# Altium PCB Sprinkler_v3_20221229.pcbdoc
Units mil, origin at the board's own origin, x right, y up, seen from the top; angles counter-clockwise.
Board outline 8914.07 x 7654.67 mil, 2 copper layers (Top Layer, Bottom Layer); 30 components, 40 nets, 224 pads, 0 vias.
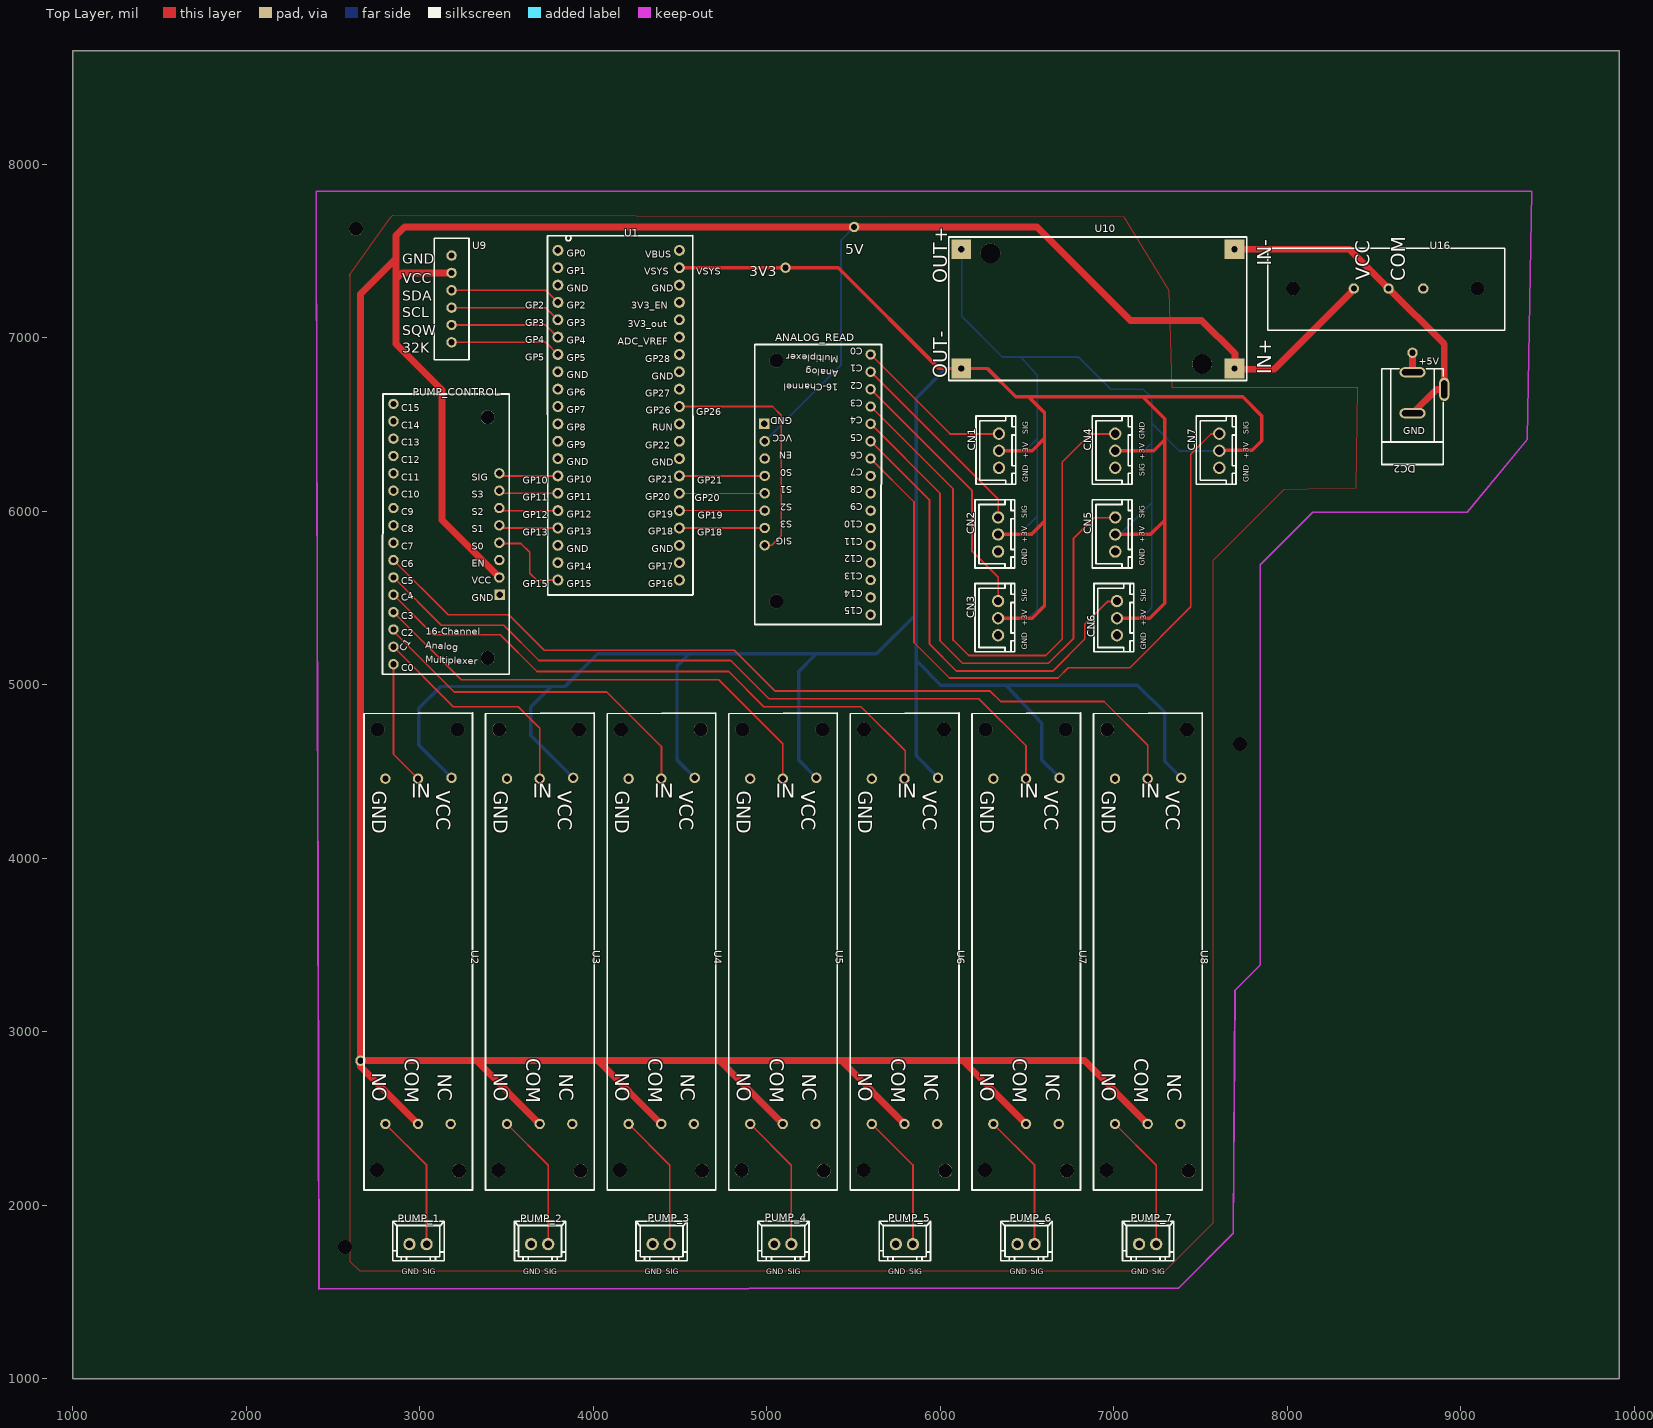
[diagram p0: Top Layer view]
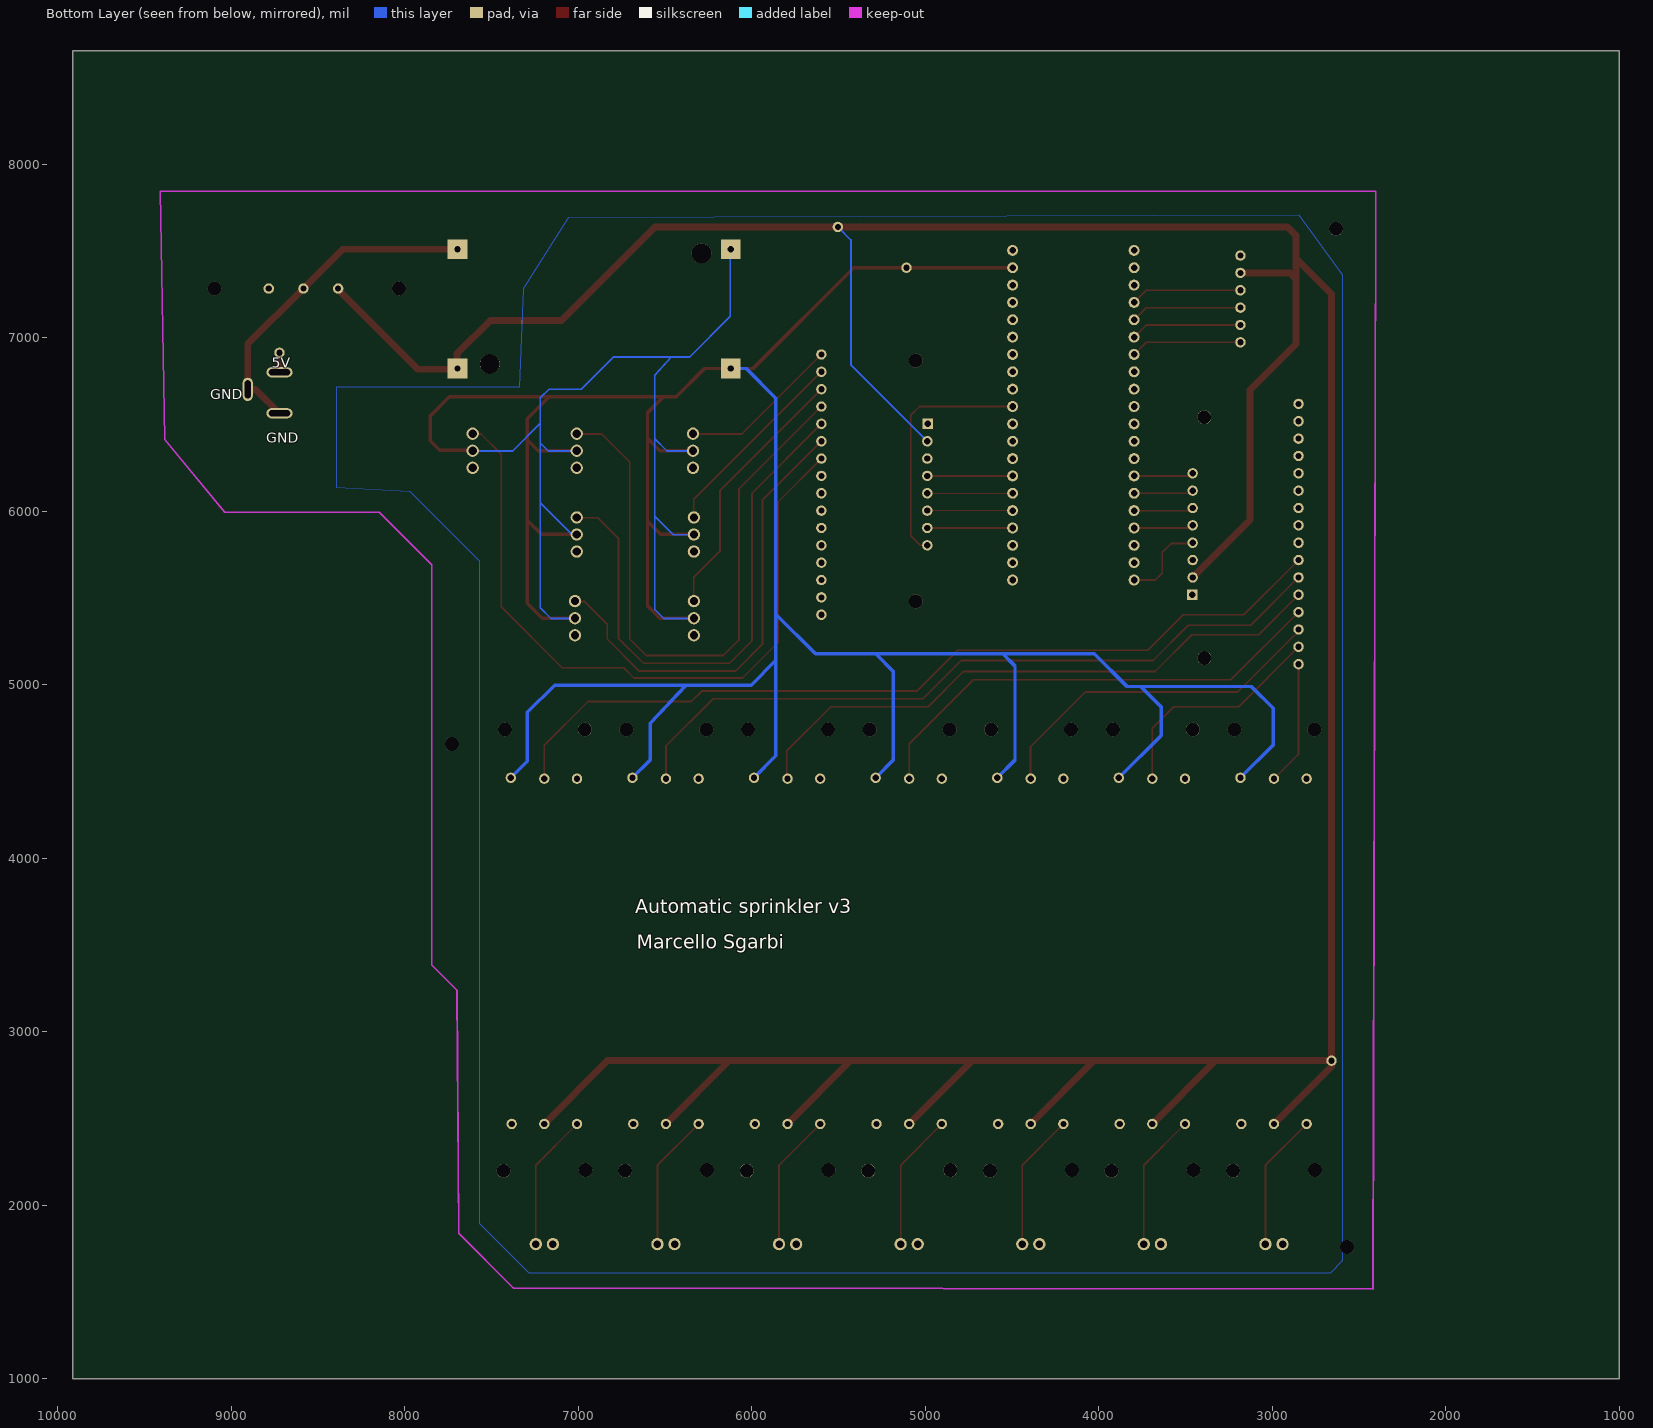
[diagram p1: Bottom Layer view, seen from below]

## Layer stack, top to bottom
Top Layer: signal copper (thickness not stored)
Dielectric: dielectric 12.6, FR-4, Dk 4.8
Bottom Layer: signal copper (thickness not stored)

## Board outline
9914.07,1000 1000,1000 1000,8654.67 9914.07,8654.67

## Components (designator, comment, footprint, x,y, rotation, side; value= is the part's Value field where it differs from the comment)
ANALOG_READ "16 - Cahnnel analog multiplexer" "16 CHANNEL ANANLOG MUX" 5598.77,5403.77 r180 top
CN1 "Signal_1" CONN-TH_XH-3A 6338.78,6348.77 r90 top
CN2 "Signal_2" CONN-TH_XH-3A 6333.78,5866.27 r90 top
CN3 "Signal_3" CONN-TH_XH-3A 6333.78,5383.77 r90 top
CN4 "Signal_4" CONN-TH_XH-3A 7008.78,6348.77 r90 top
CN5 "Signal_5" CONN-TH_XH-3A 7008.78,5866.27 r90 top
CN6 "Signal_6" CONN-TH_XH-3A 7018.78,5383.77 r90 top
CN7 "Signal_7" CONN-TH_XH-3A 7608.78,6348.77 r90 top
DC2 "KH-DC-005B-2.0-Switch" DC-IN-TH_DC-005B-13A-SWITCH 8813.62,6683.07 r180 top
PUMP_1 "XH-2A_C9900014608" CONN-TH_XH-2A 2990.42,1776.27 r0 top
PUMP_2 "XH-2A_C9900014608" CONN-TH_XH-2A 3691.22,1776.27 r0 top
PUMP_3 "XH-2A_C9900014608" CONN-TH_XH-2A 4392.02,1776.27 r0 top
PUMP_4 "XH-2A_C9900014608" CONN-TH_XH-2A 5092.92,1776.27 r0 top
PUMP_5 "XH-2A_C9900014608" CONN-TH_XH-2A 5793.72,1776.27 r0 top
PUMP_6 "XH-2A_C9900014608" CONN-TH_XH-2A 6494.52,1776.27 r0 top
PUMP_7 "XH-2A_C9900014608" CONN-TH_XH-2A 7195.42,1776.27 r0 top
PUMP_CONTROL "16 - Cahnnel analog multiplexer" "16 CHANNEL ANANLOG MUX" 2848.77,6618.77 r0 top
U1 "RaspberryPI PicoW 2022" RASPERRYPI_PICOW_2022 3768.77,7503.77 r0 top
U2 "3V realy module" "3V MODULE FOOTPRINT" 3178.77,4458.77 r270 top
U3 "3V realy module" "3V MODULE FOOTPRINT" 3879.57,4458.77 r270 top
U4 "3V realy module" "3V MODULE FOOTPRINT" 4580.47,4458.77 r270 top
U5 "3V realy module" "3V MODULE FOOTPRINT" 5281.27,4458.77 r270 top
U6 "3V realy module" "3V MODULE FOOTPRINT" 5982.07,4458.77 r270 top
U7 "3V realy module" "3V MODULE FOOTPRINT" 6682.97,4458.77 r270 top
U8 "3V realy module" "3V MODULE FOOTPRINT" 7383.77,4458.77 r270 top
U9 "RTC DS3231" "RTC DS3231" 3183.77,6973.77 r90 top
U10 "LM2596 Buck Converter" "LM2596 BUCK CONVERTER" 6120.77,7509.87 r0 top
U16 "Switch 3A 125VAC" "SWITCH 3A" 8033.77,7283.77 r0 top
? "" ? 1972.79,4671.28 r0 top
? "" ? 5916.01,7992.68 r0 top

## Footprints (in the part's own frame and the unit in brackets; to place one, negate y for a bottom-side part, rotate by r counter-clockwise, add the part's x,y. Pads: shape width x height; smd on the part's side, far side on the other; paste and mask are expansions set on the pad)
"3V MODULE FOOTPRINT" [mil]
  round 60 hole 36: 1(-5,5) 2(0,-188.19) 3(0,-376.38) 4(1989.88,-376.38) 5(1989.88,-188.19) 6(1989.88,0)
  round 80 hole 80 unplated: ""(-283.46,39.37) ""(-283.46,-421.26) ""(2255.9,-425.2) ""(2259.84,47.24)
  silkscreen extent -378,-500 2370,126
"16 CHANNEL ANANLOG MUX" [mil]
  round 60 hole 36: 1(0,0) 2(0,-100) 3(0,-200) 4(0,-300) 5(0,-400) 6(0,-500) 7(0,-600) 8(0,-700) 9(0,-800) 10(0,-900) 11(0,-1000) 12(0,-1100) 13(0,-1200) 14(0,-1300) 15(0,-1400) 16(0,-1500) 18(610.23,-1000) 19(610.23,-900) 20(610.23,-800) 21(610.23,-700) 22(610.23,-600) 23(610.23,-500) 24(610.23,-400)
  rect 60x60 hole 36: 17(612.23,-1100)
  round 80 hole 80 unplated: ""(543.31,-76.77) ""(543.31,-1464.56)
  silkscreen extent -63,-1557 667,57
CONN-TH_XH-2A [mm]
  round 1.8 hole 1.1: 1(-1.251,0) 2(1.251,0)
  silkscreen extent -3.69,-2.45 3.83,3.35
CONN-TH_XH-3A [mm]
  round 1.8 hole 1.2: 1(-2.5,0) 2(0,0) 3(2.5,0)
  silkscreen extent -4.92,-2.44 5.09,3.38
DC-IN-TH_DC-005B-13A-SWITCH [mm]
  oval 3.8x1.5 hole 0.9 slot 3.1 at 0 deg: 1(2.325,-3.001) 2(2.325,2.999)
  oval 1.5x3.4 hole 0.9 slot 2.6 at 90 deg: 3(-2.325,-0.5)
  round 1.524 hole 0.914: 4(2.325,-5.842)
  silkscreen extent -2.17,-3.5 6.83,10.5
"LM2596 BUCK CONVERTER" [mm]
  rect 2.9x2.9 hole 0.914: 1(40,-17.45) 2(40,0) 3(0,0) 4(0,-17.45)
  round 2.9 hole 2.9 unplated: ""(4.3,-0.6) ""(35.3,-16.8)
  silkscreen extent -1.8,-19.2 41.8,1.8
RASPERRYPI_PICOW_2022 [mm]
  round 1.6 hole 0.96: 1(0.71,0) 2(0.71,-2.54) 3(0.71,-5.08) 4(0.71,-7.62) 5(0.71,-10.16) 6(0.71,-12.7) 7(0.71,-15.24) 8(0.71,-17.78) 9(0.71,-20.32) 10(0.71,-22.86) 11(0.71,-25.4) 12(0.71,-27.94) 13(0.71,-30.48) 14(0.71,-33.02) 15(0.71,-35.56) 16(0.71,-38.1) 17(0.71,-40.64) 18(0.71,-43.18) 19(0.71,-45.72) 20(0.71,-48.26) 21(18.49,-48.26) 22(18.49,-45.72) 23(18.49,-43.18) 24(18.49,-40.64) 25(18.49,-38.1) 26(18.49,-35.56) 27(18.49,-33.02) 28(18.49,-30.48) 29(18.49,-27.94) 30(18.49,-25.4) 31(18.49,-22.86) 32(18.49,-20.32) 33(18.49,-17.78) 34(18.49,-15.24) 35(18.49,-12.7) 36(18.49,-10.16) 37(18.49,-7.62) 38(18.49,-5.08) 39(18.49,-2.54) 40(18.49,0)
  silkscreen extent -0.8,-50.44 20.47,2.16
"RTC DS3231" [mil]
  round 60 hole 36: 1(0,0) 2(100,0) 3(200,0) 4(300,0) 5(400,0) 6(500,0)
  silkscreen extent -100,-100 600,100
"SWITCH 3A" [mil]
  round 60 hole 36: 1(350.39,0) 2(550.39,0) 3(750.39,0)
  round 80 hole 80 unplated: ""(0,0) ""(1062.99,0)
  silkscreen extent -146,-240 1220,232
? [mil]

## Free pads (board coordinates)
  round 60 hole 36: 2(5503.78,7638.77) 3(2658.78,2833.77) 4(5108.43,7403.77)
  round 80 hole 80 unplated: ""(2568.77,1758.77) ""(2632.55,7627.98) ""(7728.77,4658.77)

## Nets (pads, with @x,y where several pads share a name; then routed paths per layer and width w, separated by ;. In a path a pad name is that pad's centre, name@x,y a point inside that pad or via, vN(x,y) a via of type N, cw(c..) or ccw(c..) an arc to the next point about the centre after c; other vN are vias at no path point)
32K: U1.7 U9.1 | length 641.9
  Top Layer w10: U9.1 3726.72,6973.77 U1.7
+3V3: CN1.2 CN2.2 CN3.2 CN4.2 CN5.2 CN6.2 CN7.2 pad.4 U1.39 U2.1 U3.1 U4.1 U5.1 U6.1 U7.1 U8.1 U10.4 | length 19480.3
  Top Layer w20: U1.39 pad.4 5411.87,7403.77 5992.77,6822.87 U10.4 6272.31,6822.85 6435.69,6659.47 7742.78,6659.47 7853.01,6549.23 7853.01,6407.5 7797.9,6352.38 7612.41,6352.38 CN7.2 ; CN3.2 6530.06,5383.76 6601.05,5454.75 6601.05,6567.28 6508.86,6659.47 ; CN2.2 6524.37,5866.26 6601.05,5942.94 ; CN1.2 6529.83,6348.76 6601.05,6419.98 ; CN5.2 7211.36,5866.26 7293.96,5948.85 ; CN4.2 7230.7,6348.76 7293.96,6412.01 ; CN6.2 7207.22,5383.76 7293.96,5470.5 7293.96,6533.49 7167.98,6659.47
  Bottom Layer w20: U2.1 2994.76,4652.78 2994.76,4864.2 3120.74,4990.18 3837.27,4990.18 4026.25,5179.16 5632.55,5179.16 5860.89,5407.5 ; 3761.17,4990.17 3758.57,4990.17 3640.47,4872.07 3640.47,4707.97 U3.1 ; 4556.17,5179.17 4553.77,5179.17 4482.97,5108.27 4482.97,4566.27 U4.1 ; U5.1 5183.77,4566.27 5183.77,5076.77 5286.07,5179.17 5291.17,5179.17 ; 5860.87,5140.47 6003.37,4998.07 7136.47,4998.07 7293.97,4840.57 7293.97,4558.57 U8.1 ; U6.1 5860.89,4589.95 5860.89,5407.5 ; U10.4@6120.73,6822.85 6032.15,6822.85 5860.89,6651.6 5860.89,5407.5 ; 6379.17,4998.07 6585.27,4777.87 6585.27,4566.47 U7.1
+5V: ANALOG_READ.18 pad.2 pad.3 PUMP_CONTROL.18 U2.5 U3.5 U4.5 U5.5 U6.5 U7.5 U8.5 U9.5 U10.1 U16.1 | length 22607.7
  Top Layer w39.37: 2863.77,7339.43 2898.11,7373.77 U9.5 ; 2863.77,7457.45 2658.77,7252.45 pad.3 ; U2.5 2658.77,2800.7 pad.3 ; 3329.91,2833.77 3329.91,2830.39 U3.5 ; PUMP_CONTROL.18 3128.77,5948.99 3128.77,6698.77 2863.77,6963.77 2863.77,7588.77 2913.77,7638.77 pad.2 6558.76,7638.77 7097.11,7100.41 7506.56,7100.41 7698.77,6908.2 7698.77,6818.77 7925.67,6818.77 8384.17,7277.27 U16.1 ; 4024.65,2833.77 4027.37,2833.77 U4.5 ; 4729.91,2833.77 4729.91,2832.05 U5.5 ; 5429.87,2833.77 U6.5 ; 6129.87,2833.77 U7.5 ; U8.5 6830.7,2833.77 pad.3
  Bottom Layer w10: ANALOG_READ.18@4988.57,6403.77 5428.77,6843.97 5428.77,7563.77 pad.2
+IN: DC2.1 DC2.4 | length 111.9
  Top Layer w39.37: DC2.1 DC2.4
GND: ANALOG_READ.17 ANALOG_READ.19 CN1.1 CN2.1 CN3.1 CN4.1 CN5.1 CN6.1 CN7.1 PUMP_1.1 PUMP_2.1 PUMP_3.1 PUMP_4.1 PUMP_5.1 PUMP_6.1 PUMP_7.1 PUMP_CONTROL.17 PUMP_CONTROL.19 U1.38 U2.3 U3.3 U4.3 U5.3 U6.3 U7.3 U8.3 U9.6 U10.3 | length 6334.2
  Bottom Layer w10: U10.3@6123.97,7505.78 6123.97,7123.57 6358.77,6888.77 6463.77,6888.77 ; 6333.77,5382.27 6507.27,5382.27 6558.77,5433.77 6558.77,6773.77 6558.77,6783.77 6463.77,6888.77 ; 6333.77,5864.77 6453.09,5864.77 6558.77,5970.45 ; 6338.77,6347.27 6488.59,6347.27 6558.77,6417.45 ; 7008.77,5864.77 7034.8,5864.77 7218.77,6048.74 ; 7008.77,6347.27 7172.56,6347.27 7218.77,6393.48 ; 7018.77,5382.27 7157.27,5382.27 7218.77,5443.77 7218.77,6653.77 7168.77,6703.77 6983.77,6703.77 6798.77,6888.77 6463.77,6888.77 ; 7218.77,6506.64 7378.15,6347.27 7608.77,6347.27
GND5: DC2.2 DC2.3 U10.2 U16.2 | length 1936.4
  Top Layer w39.37: U10.2 8358.06,7509.87 U16.2 8905.17,6962.76 8905.17,6702.77 8859.87,6702.77 DC2.2
NETPORT1: PUMP_CONTROL.24 U1.14 | length 343.9
  Top Layer w10: PUMP_CONTROL.24 3473.97,6203.77 U1.14
NETPORT2: PUMP_CONTROL.23 U1.15 | length 343.9
  Top Layer w10: PUMP_CONTROL.23 3474,6103.77 U1.15
NETPORT3: PUMP_CONTROL.22 U1.16 | length 343.9
  Top Layer w10: PUMP_CONTROL.22 3474,6003.77 U1.16
NETPORT4: PUMP_CONTROL.21 U1.17 | length 343.9
  Top Layer w10: PUMP_CONTROL.21 3474,5903.77 U1.17
NETPORT5: PUMP_CONTROL.20 U1.20 | length 497.1
  Top Layer w10: PUMP_CONTROL.20 3464,5813.77 3583.77,5813.77 3633.77,5763.77 3633.77,5643.77 3673.77,5603.77 U1.20
NETPORT6: ANALOG_READ.20 U1.27 | length 497.7
  Top Layer w10: U1.27@4490.82,6202.78 ANALOG_READ.20
NETPORT7: ANALOG_READ.21 U1.26 | length 489.9
  Top Layer w10: U1.26@4498.69,6100.42 ANALOG_READ.21
NETPORT8: ANALOG_READ.22 U1.25 | length 489.9
  Top Layer w10: U1.25@4498.69,6005.93 ANALOG_READ.22
NETPORT9: ANALOG_READ.23 U1.24 | length 489.9
  Top Layer w10: U1.24@4498.69,5903.57 ANALOG_READ.23
NETPORT10: ANALOG_READ.24 U1.31 | length 1418.8
  Top Layer w10: U1.31@4498.69,6604.35 5033.77,6603.77 5083.77,6553.77 5083.77,5858.77 5028.77,5803.77 ANALOG_READ.24
NETPORT11: PUMP_CONTROL.16 U2.2 | length 718.7
  Top Layer w10: PUMP_CONTROL.16 2848.77,4600.58 U2.2
NETPORT12: PUMP_CONTROL.15 U3.2 | length 1328.1
  Top Layer w10: PUMP_CONTROL.15 3193.77,4873.77 3567.87,4873.77 3691.37,4750.17 U3.2
NETPORT13: PUMP_CONTROL.14 U4.2 | length 2016.1
  Top Layer w10: PUMP_CONTROL.14 2848.77,5308.77 3198.77,4958.77 4078.77,4958.77 4393.77,4643.77 4393.77,4460.29 U4.2
NETPORT14: PUMP_CONTROL.13 U5.2 | length 2759.5
  Top Layer w10: PUMP_CONTROL.13 3238.77,5028.77 4723.77,5028.77 5093.08,4659.46 U5.2
NETPORT15: PUMP_CONTROL.12 U6.2 | length 3484.8
  Top Layer w10: PUMP_CONTROL.12 3078.77,5288.77 3463.77,5288.77 3675.77,5076.77 4780.77,5076.77 4983.77,4873.77 5543.77,4873.77 5798.77,4618.77 5798.77,4463.67 U6.2
NETPORT16: PUMP_CONTROL.11 U7.2 | length 4237.2
  Top Layer w10: PUMP_CONTROL.11 3123.77,5343.77 3483.77,5343.77 3687.77,5139.77 4792.77,5139.77 5013.27,4919.27 6223.17,4919.27 6494.77,4647.77 U7.2
NETPORT17: PUMP_CONTROL.10 U8.2 | length 4981.9
  Top Layer w10: PUMP_CONTROL.10 3163.77,5403.77 3513.77,5403.77 3718.77,5198.77 4813.77,5198.77 5048.77,4963.77 6288.77,4963.77 6348.77,4903.77 6943.77,4903.77 7195.58,4651.96 U8.2
NETPORT18: PUMP_1.2 U2.4 | length 790.9
  Top Layer w10: U2.4 3039.64,2231.64 PUMP_1.2@3039.64,1776.27
NETPORT19: PUMP_2.2 U3.4 | length 790.9
  Top Layer w10: U3.4 3740.47,2231.64 PUMP_2.2
NETPORT20: PUMP_3.2 U4.4 | length 790.9
  Top Layer w10: U4.4 4441.31,2231.64 PUMP_3.2
NETPORT21: PUMP_4.2 U5.4 | length 790.9
  Top Layer w10: U5.4 5142.14,2231.64 PUMP_4.2@5142.14,1776.27
NETPORT22: PUMP_5.2 U6.4 | length 790.9
  Top Layer w10: U6.4 5842.97,2231.64 PUMP_5.2
NETPORT23: PUMP_6.2 U7.4 | length 790.9
  Top Layer w10: U7.4 6543.81,2231.64 PUMP_6.2
NETPORT24: PUMP_7.2 U8.4 | length 790.9
  Top Layer w10: U8.4 7244.64,2231.64 PUMP_7.2@7244.64,1776.27
NETPORT25: ANALOG_READ.16 CN1.3 | length 929.8
  Top Layer w10: ANALOG_READ.16 6056.87,6445.67 CN1.3@6338.77,6445.67
NETPORT26: ANALOG_READ.15 CN2.3 | length 1145
  Top Layer w10: ANALOG_READ.15 6333.77,6068.77 CN2.3@6333.77,5963.17
NETPORT27: ANALOG_READ.14 CN3.3 | length 1527.5
  Top Layer w10: ANALOG_READ.14 6183.77,6118.77 6183.77,5768.77 6333.77,5618.77 CN3.3@6333.77,5480.67
NETPORT28: ANALOG_READ.13 CN4.3 | length 3640.4
  Top Layer w10: ANALOG_READ.13 6073.77,6128.77 6073.77,5258.77 6163.77,5168.77 6608.77,5168.77 6703.77,5263.77 6703.77,6283.77 6865.67,6445.67 CN4.3@7008.77,6445.67
NETPORT29: ANALOG_READ.12 CN5.3 | length 3164.1
  Top Layer w10: ANALOG_READ.12 5998.77,6103.77 5998.77,5253.77 6128.77,5123.77 6623.77,5123.77 6768.77,5268.77 6768.77,5843.77 6888.17,5963.17 CN5.3@7008.77,5963.17
NETPORT30: ANALOG_READ.11 CN6.3 | length 2671.3
  Top Layer w10: ANALOG_READ.11 5938.77,6063.77 5938.77,5233.77 6093.77,5078.77 6648.77,5078.77 6833.77,5263.77 6833.77,5348.77 6965.67,5480.67 CN6.3@7018.77,5480.67
NETPORT31: ANALOG_READ.10 CN7.3 | length 4106.7
  Top Layer w10: ANALOG_READ.10 5848.77,6053.77 5848.77,5243.77 6053.77,5038.77 6678.77,5038.77 6738.77,5098.77 7093.77,5098.77 7443.77,5448.77 7443.77,6328.77 7560.67,6445.67 CN7.3@7608.77,6445.67
SCL: U1.5 U9.3 | length 641.9
  Top Layer w10: U9.3 3726.72,7173.77 U1.5
SDA: U1.4 U9.4 | length 641.9
  Top Layer w10: U9.4 3726.72,7273.77 U1.4
SQW: U1.6 U9.2 | length 641.9
  Top Layer w10: U9.2 3726.72,7073.77 U1.6
pads on no net: ANALOG_READ. ANALOG_READ.1 ANALOG_READ.2 ANALOG_READ.3 ANALOG_READ.4 ANALOG_READ.5 ANALOG_READ.6 ANALOG_READ.7 ANALOG_READ.8 ANALOG_READ.9 PUMP_CONTROL. PUMP_CONTROL.1 PUMP_CONTROL.2 PUMP_CONTROL.3 PUMP_CONTROL.4 PUMP_CONTROL.5 PUMP_CONTROL.6 PUMP_CONTROL.7 PUMP_CONTROL.8 PUMP_CONTROL.9 U1.1 U1.2 U1.3 U1.8 U1.9 U1.10 U1.11 U1.12 U1.13 U1.18 U1.19 U1.21 U1.22 U1.23 U1.28 U1.29 U1.30 U1.32 U1.33 U1.34 U1.35 U1.36 U1.37 U1.40 U2. U2.6 U3. U3.6 U4. U4.6 U5. U5.6 U6. U6.6 U7. U7.6 U8. U8.6 U10. U16. U16.3

## Polygon pours and split planes (outlines as drawn)
GND on Bottom Layer (solid): 2845.15,7706.71 7057.74,7690.96 7317.58,7281.52 7341.2,6714.59 8396.32,6714.59 8396.32,6139.79 7971.12,6116.16 7569.55,5714.59 7569.55,1895.7 7286.09,1612.24 2664.05,1612.24 2593.18,1683.1 2593.18,7360.26 2601.06,7368.13
GND on Top Layer (solid): 2829.4,7690.96 2845.15,7706.71 7057.74,7698.84 7317.58,7273.64 7333.33,6714.59 8404.19,6714.59 8396.32,6131.91 7979,6124.04 7569.55,5714.59 7569.55,1895.7 7293.96,1620.11 2656.17,1620.11 2601.06,1675.23 2601.06,7360.26 2593.18,7360.26

## Silkscreen, mask and mechanical layers (free items; w line width, h text height)
Top Overlay:
  text "5V" at 5451.44,7480.34 h59.05
  text "VSYS" at 4593.17,7364.19 h39.37
  text "3V3" at 4900.26,7354.35 h59.05
  text "GP2" at 3608.92,7167.34 h39.37
  text "GP3" at 3608.86,7067.21 h39.37
  text "GP4" at 3608.91,6967.06 h39.37
  text "GP5" at 3608.86,6866.93 h39.37
  text "+5V" at 8758.52,6844.51 h39.37
  text "GP26" at 4593.17,6553.17 h39.37
  text "GND" at 8667.98,6442.93 h39.37
  text "GP10" at 3593.18,6159.47 h39.37
  text "GP21" at 4601.05,6159.47 h39.37
  text "GP11" at 3593.23,6059.25 h39.37
  text "GP20" at 4584.91,6056.72 h39.37
  text "GP12" at 3593.16,5959.07 h39.37
  text "GP19" at 4602.62,5956.33 h39.37
  text "GP13" at 3593.16,5858.81 h39.37
  text "GP18" at 4601.05,5857.9 h39.37
  text "GP15" at 3593.18,5561.05 h39.37
Bottom Overlay:
  text "5V" at 8766.39,6826.79 h59.05
  text "GND" at 9120.72,6645.69 h59.05
  text "GND" at 8797.89,6393.72 h59.05
  text "Automatic sprinkler v3" at 6671.91,3682.47 h80
  text "Marcello Sgarbi" at 6664.04,3477.75 h80

## Text inside footprints (layer, text, board x,y; h text height)
ANALOG_READ: Top Overlay "16-Channel" at 5413.73,6735.26 h39.37 r180; Top Overlay "Analog" at 5415.11,6811.64 h39.37 r176; Top Overlay "Multiplexer" at 5414.42,6895.09 h39.37 r178; Top Overlay "C15" at 5553.48,5445.89 h39.37 r180; Top Overlay "C14" at 5553.44,5545.71 h39.37 r180; Top Overlay "C13" at 5553.44,5645.61 h39.37 r180; Top Overlay "C12" at 5553.44,5745.43 h39.37 r180; Top Overlay "C11" at 5553.47,5845.36 h39.37 r180; Top Overlay "C10" at 5553.44,5945.22 h39.37 r180; Top Overlay "C9" at 5553.5,6045 h39.37 r180; Top Overlay "C8" at 5553.46,6144.79 h39.37 r180; Top Overlay "C7" at 5553.51,6244.63 h39.37 r180; Top Overlay "C6" at 5552.76,6344.38 h39.37 r182; Top Overlay "C5" at 5553.43,6444.22 h39.37 r180; Top Overlay "C4" at 5553.45,6544.06 h39.37 r180; Top Overlay "C3" at 5553.49,6643.88 h39.37 r180; Top Overlay "C2" at 5553.49,6743.73 h39.37 r180; Top Overlay "C1" at 5553.52,6843.67 h39.37 r180; Top Overlay "C0" at 5553.45,6943.53 h39.37 r180; Top Overlay "SIG" at 5148,5846.28 h39.37 r180; Top Overlay "S3" at 5148,5945.49 h39.37 r180; Top Overlay "S2" at 5147.95,6044.75 h39.37 r180; Top Overlay "S1" at 5148.01,6143.93 h39.37 r180; Top Overlay "S0" at 5147.97,6243.18 h39.37 r180; Top Overlay "EN" at 5147.95,6342.4 h39.37 r180; Top Overlay "VCC" at 5148,6441.61 h39.37 r180; Top Overlay "GND" at 5147.98,6540.77 h39.37 r180
CN1: Top Overlay "+3V" at 6508.07,6301.88 h31.5 r90; Top Overlay "GND" at 6508.05,6167.66 h31.5 r90; Top Overlay "SIG" at 6508.07,6443.25 h31.5 r90
CN2: Top Overlay "+3V" at 6503.07,5819.38 h31.5 r90; Top Overlay "GND" at 6503.05,5685.16 h31.5 r90; Top Overlay "SIG" at 6503.07,5960.75 h31.5 r90
CN3: Top Overlay "+3V" at 6503.07,5336.88 h31.5 r90; Top Overlay "GND" at 6503.05,5202.66 h31.5 r90; Top Overlay "SIG" at 6503.07,5478.25 h31.5 r90
CN4: Top Overlay "+3V" at 7178.07,6295.77 h31.5 r90; Top Overlay "GND" at 7178.05,6415.69 h31.5 r90; Top Overlay "SIG" at 7178.07,6203.1 h31.5 r90
CN5: Top Overlay "+3V" at 7178.07,5819.38 h31.5 r90; Top Overlay "GND" at 7178.05,5685.16 h31.5 r90; Top Overlay "SIG" at 7178.07,5960.75 h31.5 r90
CN6: Top Overlay "+3V" at 7188.07,5336.88 h31.5 r90; Top Overlay "GND" at 7188.05,5202.66 h31.5 r90; Top Overlay "SIG" at 7188.07,5478.25 h31.5 r90
CN7: Top Overlay "+3V" at 7778.07,6301.88 h31.5 r90; Top Overlay "GND" at 7778.05,6167.66 h31.5 r90; Top Overlay "SIG" at 7778.07,6443.25 h31.5 r90
PUMP_1: Top Overlay "GND" at 2895.93,1603.02 h31.5; Top Overlay "SIG" at 3017.98,1603.04 h31.5
PUMP_2: Top Overlay "GND" at 3596.73,1603.02 h31.5; Top Overlay "SIG" at 3718.78,1603.04 h31.5
PUMP_3: Top Overlay "GND" at 4297.53,1603.02 h31.5; Top Overlay "SIG" at 4419.58,1603.04 h31.5
PUMP_4: Top Overlay "GND" at 4998.43,1603.02 h31.5; Top Overlay "SIG" at 5120.48,1603.04 h31.5
PUMP_5: Top Overlay "GND" at 5699.23,1603.02 h31.5; Top Overlay "SIG" at 5821.28,1603.04 h31.5
PUMP_6: Top Overlay "GND" at 6400.03,1603.02 h31.5; Top Overlay "SIG" at 6522.08,1603.04 h31.5
PUMP_7: Top Overlay "GND" at 7100.93,1603.02 h31.5; Top Overlay "SIG" at 7222.98,1603.04 h31.5
PUMP_CONTROL: Top Overlay "16-Channel" at 3033.81,5287.27 h39.37; Top Overlay "Analog" at 3032.44,5210.89 h39.37 r356; Top Overlay "Multiplexer" at 3033.13,5127.44 h39.37 r358; Top Overlay "C15" at 2894.06,6576.64 h39.37; Top Overlay "C14" at 2894.1,6476.82 h39.37; Top Overlay "C13" at 2894.1,6376.92 h39.37; Top Overlay "C12" at 2894.1,6277.1 h39.37; Top Overlay "C11" at 2894.07,6177.17 h39.37; Top Overlay "C10" at 2894.1,6077.31 h39.37; Top Overlay "C9" at 2894.04,5977.53 h39.37; Top Overlay "C8" at 2894.08,5877.74 h39.37; Top Overlay "C7" at 2894.03,5777.9 h39.37; Top Overlay "C6" at 2894.1,5678.14 h39.37; Top Overlay "C5" at 2894.11,5578.31 h39.37; Top Overlay "C4" at 2899.19,5479.14 h39.37 r15; Top Overlay "C3" at 2894.05,5378.65 h39.37; Top Overlay "C2" at 2894.05,5278.8 h39.37; Top Overlay "C1" at 2910.15,5187.26 h39.37 r55; Top Overlay "C0" at 2894.09,5079 h39.37; Top Overlay "SIG" at 3299.54,6176.25 h39.37; Top Overlay "S3" at 3299.54,6077.04 h39.37; Top Overlay "S2" at 3299.59,5977.78 h39.37; Top Overlay "S1" at 3299.53,5878.6 h39.37; Top Overlay "S0" at 3299.57,5779.35 h39.37; Top Overlay "EN" at 3299.59,5680.13 h39.37; Top Overlay "VCC" at 3299.54,5580.92 h39.37; Top Overlay "GND" at 3299.56,5481.76 h39.37
U1: Top Overlay "GP0" at 3848.66,7466.76 h39.37; Top Overlay "GP1" at 3848.67,7366.48 h39.37; Top Overlay "GND" at 3848.69,7266.3 h39.37; Top Overlay "GP2" at 3848.7,7166.16 h39.37; Top Overlay "GP3" at 3848.64,7066.03 h39.37; Top Overlay "GP4" at 3848.69,6965.88 h39.37; Top Overlay "GP5" at 3848.64,6865.75 h39.37; Top Overlay "GND" at 3848.64,6765.53 h39.37; Top Overlay "GP6" at 3848.68,6665.33 h39.37; Top Overlay "GP7" at 3848.69,6565.09 h39.37; Top Overlay "GP8" at 3848.62,6464.79 h39.37; Top Overlay "GP9" at 3848.71,6364.6 h39.37; Top Overlay "GND" at 3848.64,6264.38 h39.37; Top Overlay "GP10" at 3848.64,6164.24 h39.37; Top Overlay "GP11" at 3848.69,6064.02 h39.37; Top Overlay "GP12" at 3848.62,5963.84 h39.37; Top Overlay "GP13" at 3848.62,5863.58 h39.37; Top Overlay "GND" at 3848.63,5763.36 h39.37; Top Overlay "GP14" at 3848.71,5663.07 h39.37; Top Overlay "GP15" at 3848.67,5562.82 h39.37; Top Overlay "GP16" at 4318.42,5560.85 h39.37; Top Overlay "GP17" at 4316.41,5663.61 h39.37; Top Overlay "GND" at 4337.27,5762.43 h39.37; Top Overlay "GP18" at 4316.8,5863.61 h39.37; Top Overlay "GP19" at 4318.37,5962.04 h39.37; Top Overlay "GP20" at 4300.66,6062.43 h39.37; Top Overlay "GP21" at 4316.8,6165.18 h39.37; Top Overlay "GND" at 4337.27,6262.82 h39.37; Top Overlay "GP22" at 4300.66,6361.64 h39.37; Top Overlay "RUN" at 4339.24,6462.82 h39.37; Top Overlay "GP26" at 4302.23,6563.22 h39.37; Top Overlay "GP27" at 4300.66,6659.67 h39.37; Top Overlay "GND" at 4337.27,6758.88 h39.37; Top Overlay "GP28" at 4300.66,6860.07 h39.37; Top Overlay "ADC_VREF" at 4142.39,6960.85 h39.37; Top Overlay "3V3_out" at 4198.69,7061.64 h39.37; Top Overlay "3V3_EN" at 4219.58,7166.68 h39.37; Top Overlay "GND" at 4337.39,7264.76 h39.37; Top Overlay "VSYS" at 4295.08,7362.8 h39.37; Top Overlay "VBUS" at 4298.69,7460.85 h39.37
U2: Top Overlay "VCC" at 3095.46,4387.9 h80 r270; Top Overlay "IN" at 2950.45,4347.87 h80; Top Overlay "GND" at 2725.38,4387.89 h80 r270; Top Overlay "NC" at 3103.34,2759.1 h80 r270; Top Overlay "COM" at 2914.35,2848.54 h80 r270; Top Overlay "NO" at 2725.38,2762.8 h80 r270
U3: Top Overlay "VCC" at 3796.26,4387.9 h80 r270; Top Overlay "IN" at 3651.25,4347.87 h80; Top Overlay "GND" at 3426.18,4387.89 h80 r270; Top Overlay "NC" at 3804.14,2759.1 h80 r270; Top Overlay "COM" at 3615.15,2848.54 h80 r270; Top Overlay "NO" at 3426.18,2762.8 h80 r270
U4: Top Overlay "VCC" at 4497.16,4387.9 h80 r270; Top Overlay "IN" at 4352.15,4347.87 h80; Top Overlay "GND" at 4127.08,4387.89 h80 r270; Top Overlay "NC" at 4505.04,2759.1 h80 r270; Top Overlay "COM" at 4316.05,2848.54 h80 r270; Top Overlay "NO" at 4127.08,2762.8 h80 r270
U5: Top Overlay "VCC" at 5197.96,4387.9 h80 r270; Top Overlay "IN" at 5052.95,4347.87 h80; Top Overlay "GND" at 4827.88,4387.89 h80 r270; Top Overlay "NC" at 5205.84,2759.1 h80 r270; Top Overlay "COM" at 5016.85,2848.54 h80 r270; Top Overlay "NO" at 4827.88,2762.8 h80 r270
U6: Top Overlay "VCC" at 5898.76,4387.9 h80 r270; Top Overlay "IN" at 5753.75,4347.87 h80; Top Overlay "GND" at 5528.68,4387.89 h80 r270; Top Overlay "NC" at 5906.64,2759.1 h80 r270; Top Overlay "COM" at 5717.65,2848.54 h80 r270; Top Overlay "NO" at 5528.68,2762.8 h80 r270
U7: Top Overlay "VCC" at 6599.66,4387.9 h80 r270; Top Overlay "IN" at 6454.65,4347.87 h80; Top Overlay "GND" at 6229.58,4387.89 h80 r270; Top Overlay "NC" at 6607.54,2759.1 h80 r270; Top Overlay "COM" at 6418.55,2848.54 h80 r270; Top Overlay "NO" at 6229.58,2762.8 h80 r270
U8: Top Overlay "VCC" at 7300.46,4387.9 h80 r270; Top Overlay "IN" at 7155.45,4347.87 h80; Top Overlay "GND" at 6930.38,4387.89 h80 r270; Top Overlay "NC" at 7308.34,2759.1 h80 r270; Top Overlay "COM" at 7119.35,2848.54 h80 r270; Top Overlay "NO" at 6930.38,2762.8 h80 r270
U9: Top Overlay "32K" at 2900.33,6913.41 h59.05; Top Overlay "SQW" at 2900.29,7015.77 h59.05; Top Overlay "SCL" at 2900.25,7118.13 h59.05; Top Overlay "SDA" at 2900.27,7212.62 h59.05; Top Overlay "VCC" at 2900.27,7314.98 h59.05; Top Overlay "GND" at 2900.26,7425.22 h59.05
U10: Top Overlay "IN+" at 7908.83,6789.4 h80 r90; Top Overlay "IN-" at 7908.8,7415.38 h80 r90; Top Overlay "OUT-" at 6040.67,6765.78 h80 r90; Top Overlay "OUT+" at 6040.71,7313.02 h80 r90
U16: Top Overlay "VCC" at 8475.34,7330.75 h80 r90; Top Overlay "COM" at 8680.07,7327.08 h80 r90